# EAGLE board V1_Potenciómetro (EAGLE 5.09)
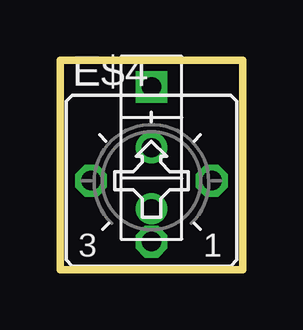
[diagram p0: board, top side]
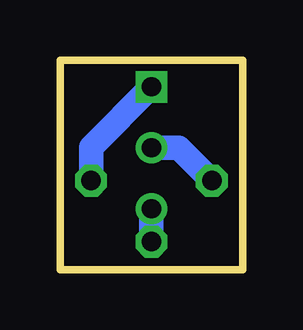
[diagram p1: board, bottom side, seen from below]

Size 7.62 x 8.74 mm. Coordinates in mm from the lower left corner, seen from the top.
Outline: 0,8.74 7.62,8.74 7.62,0 0,0 0,8.74
Copper layers (1*16): Top 0.035mm / dielectric 1.5mm / Bottom 0.035mm
Design rules "default": minimum track width 10mil, minimum drill 24mil, track to track 8mil, track to pad 8mil, pad to pad 8mil, via to via 8mil, smd to smd 8mil, copper to edge 40mil, drill to drill 8mil, minimum pad ring 10mil, minimum via ring 8mil, stop-mask expansion 4mil, vias tented up to drill 0mil, thermal gap 10mil

## Footprints (pad centres in the part's own frame; a part is rotated, then mirrored left to right if it is on the bottom)
TIRADE3PINES = drill 0.8 square: P$1 1.27,1.27 | drill 0.8 round: P$2 3.81,1.27; P$3 6.35,1.27
CT6 = drill 0.813 octagon: A 2.515,0; E -2.515,0; S 0,-2.54

## Placement (x,y rotation side)
E$2  [TIRADE3PINES]  2.54,8.89 270 top
E$4  [CT6]  3.81,3.71 0 top

## Library data of the parts
E$2 = Robot
E$4 = pot

## Nets
S$1: E$2.P$3 E$4.S
S$2: E$2.P$2 E$4.E
S$3: E$2.P$1 E$4.A

## Tracks (layer width: path | path; a pad name or v marks a point on that pad's centre or on a via)
S$1
  Bottom 1.016: E$4.S E$2.P$3
S$2
  Bottom 1.016: E$2.P$2 2.67,5.08 E$4.E
S$3
  Bottom 1.016: E$2.P$1 6.32,5.11 E$4.A